# Altium PCB Glucometer-I.C.- RF Module.PcbDoc
Units mm, origin at the board's own origin, x right, y up, seen from the top; angles counter-clockwise.
Board outline 26.85 x 32.2 mm, 2 copper layers (Top Layer, Bottom Layer); 2 components, 9 nets, 22 pads, 0 vias.
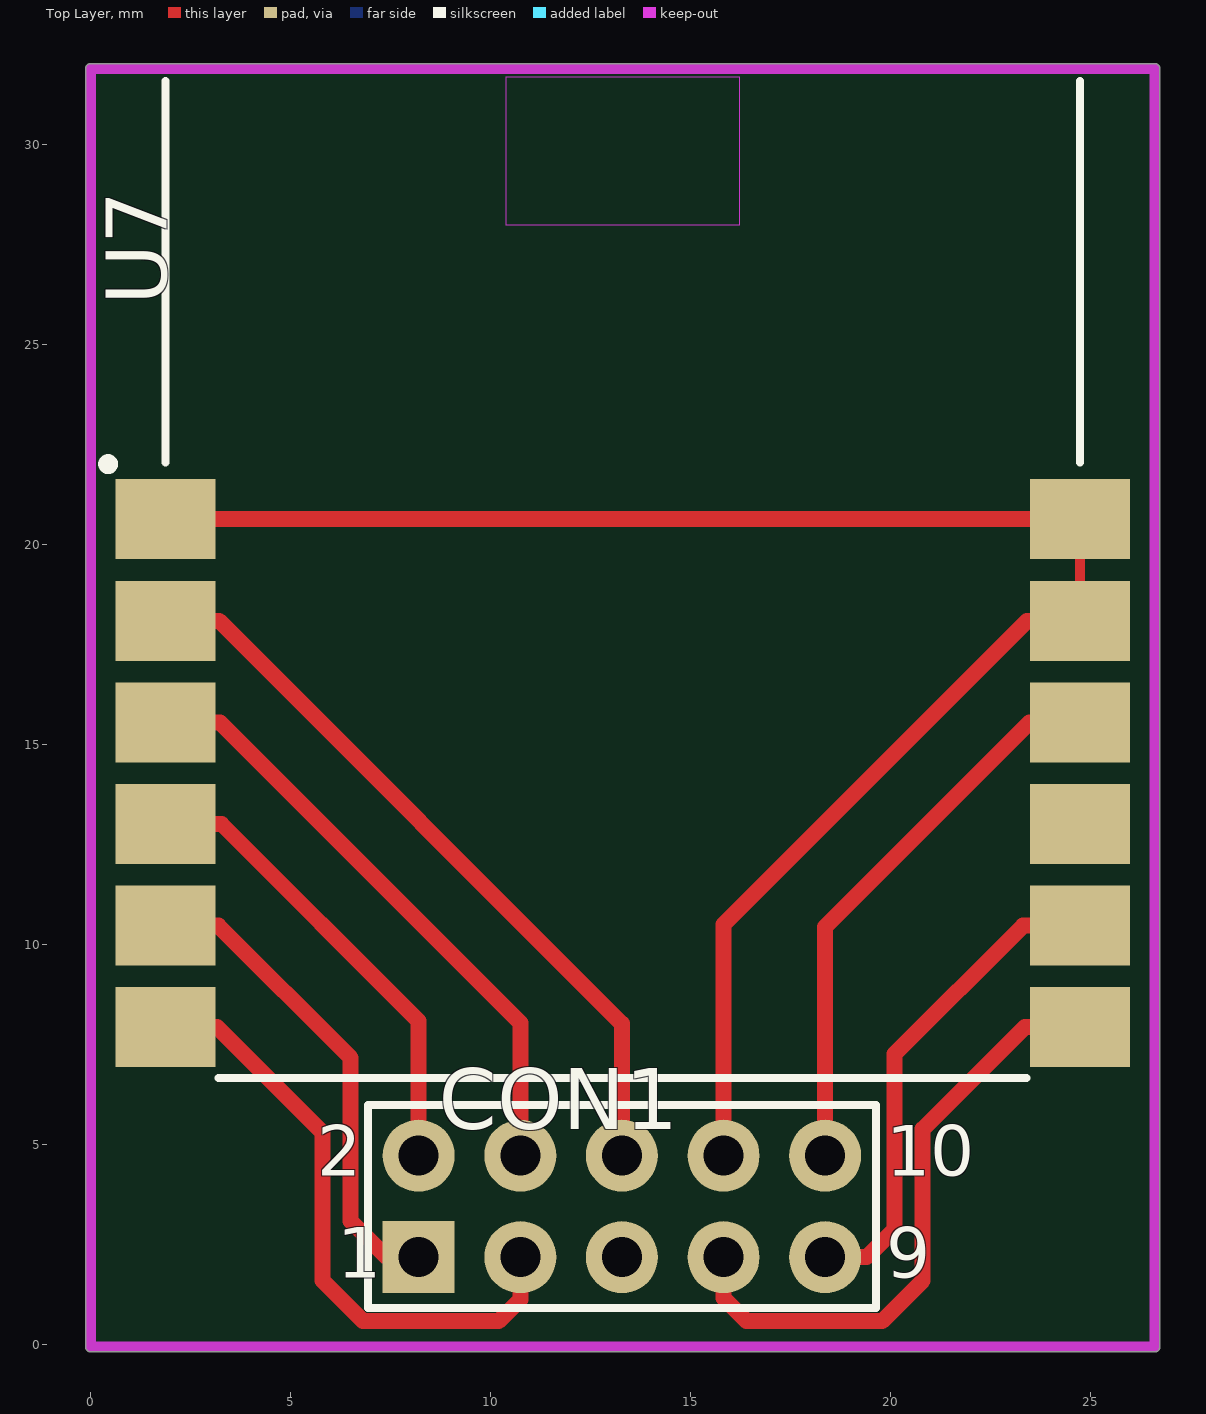
[diagram p0: Top Layer view]
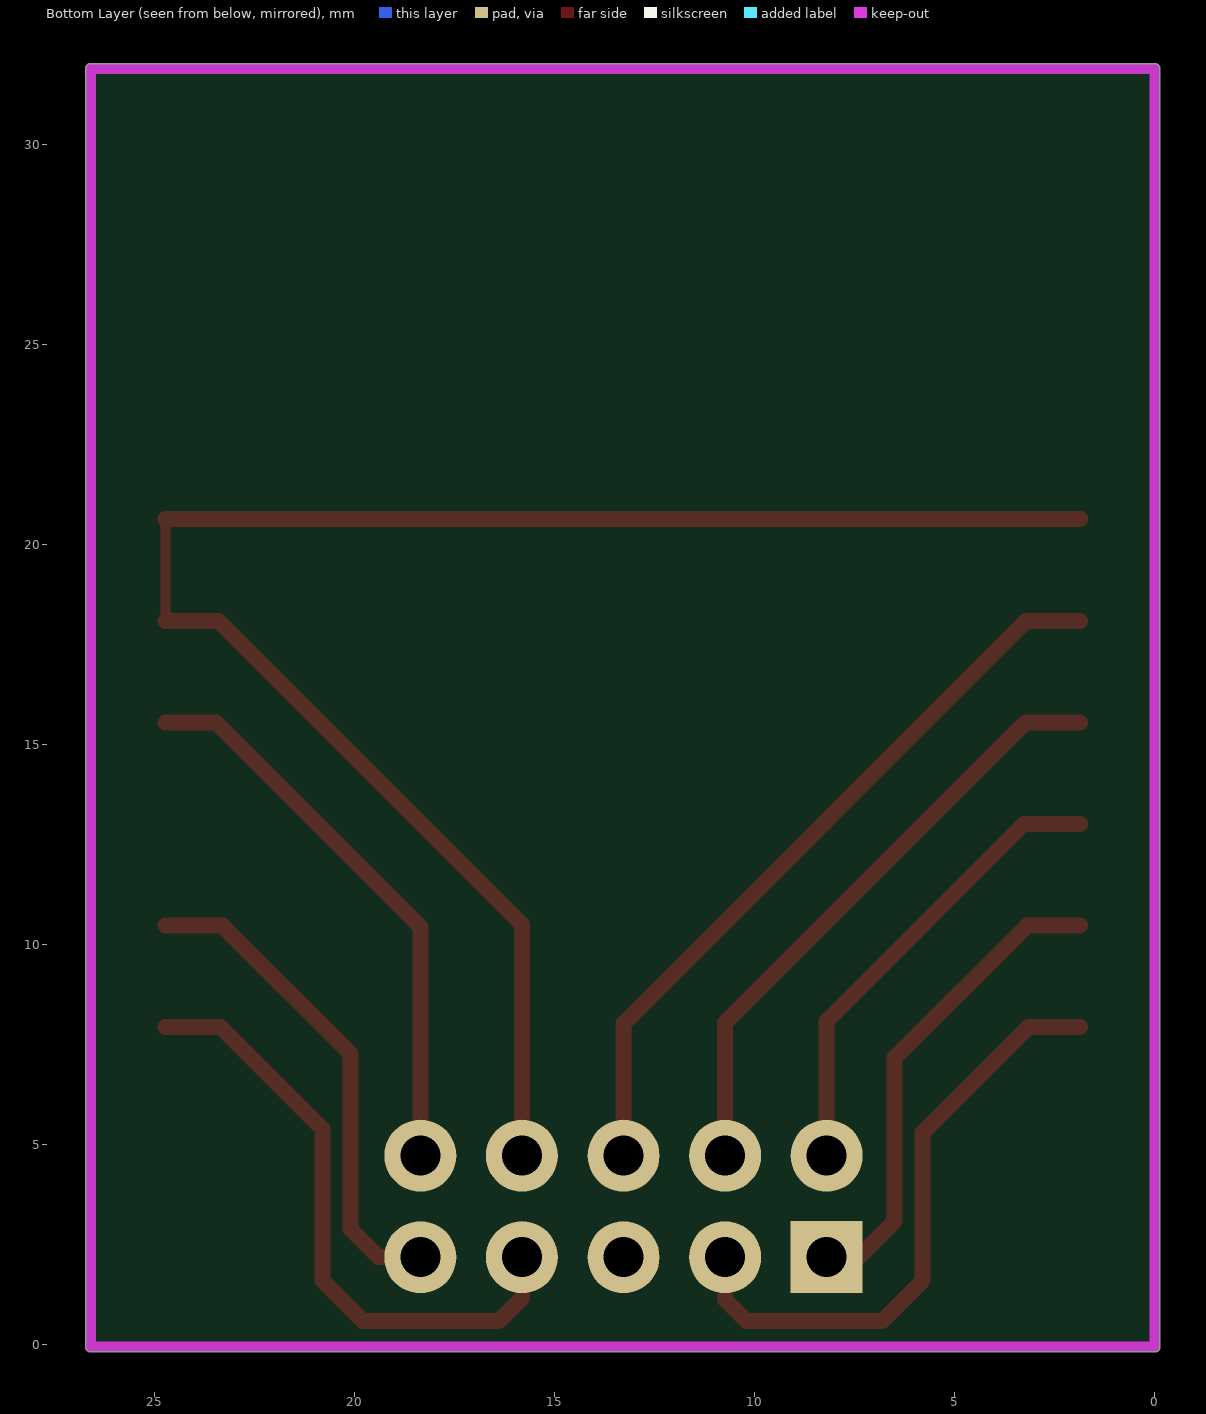
[diagram p1: Bottom Layer view, seen from below]

## Layer stack, top to bottom
Top Layer: signal copper 0.0356
Dielectric: dielectric 0.32, FR-4, Dk 4.8
Bottom Layer: signal copper 0.0356

## Board outline
-0.127,-0.05 ccw(c0,-0.05) 0,-0.177 26.6,-0.177 ccw(c26.6,-0.05) 26.727,-0.05 26.727,31.9 ccw(c26.6,31.9) 26.6,32.027 0,32.027 ccw(c0,31.9) -0.127,31.9

## Design rules (kind name [scope] priority, off if disabled: settings)
Clearance [All] p1: gap=0.3
PolygonConnect [All] p1: connectstyle=Relief reliefconductorwidth=0.254 reliefentries=4 polygonreliefangle="90 Angle" airgapwidth=0.254
RoutingVias [All] p1: holewidth=0.711 width=1.27 viastyle="Through Hole" minholewidth=0.711 minwidth=1.27 maxholewidth=0.711 maxwidth=1.27
SolderMaskExpansion [All] p1: expansion=0.102
Width [All] p1: maxlimit=5 minlimit=0.25 preferedwidth=0.3 minimp=50.000000 maximp=50.000000 favimp=50.000000
28 further rules are at their usual default settings.

## Components (designator, comment, footprint, x,y, rotation, side; value= is the part's Value field where it differs from the comment)
CON1 "Header 5X2" HDR2X5 8.2,2.187 r0 top
U7 "MRF24J40MB-I/RM" MRF24J40MB 13.3,31.688 r0 top

## Footprints (in the part's own frame and the unit in brackets; to place one, negate y for a bottom-side part, rotate by r counter-clockwise, add the part's x,y. Pads: shape width x height; smd on the part's side, far side on the other; paste and mask are expansions set on the pad)
HDR2X5 [mm] "Connector; Header; 5x2 Position"
  rect 1.8x1.8 hole 1: 1(0,0)
  round 1.8 hole 1: 2(0,2.54) 3(2.54,0) 4(2.54,2.54) 5(5.08,0) 6(5.08,2.54) 7(7.62,0) 8(7.62,2.54) 9(10.16,0) 10(10.16,2.54)
  silkscreen extent -1.27,-1.27 11.43,3.81
MRF24J40MB [mm] "SM Module; 12 Leads; Body 33x22.9x2.5mm (LxWxH), Microchip Recommended"
  rect 2.5x2 smd paste-4.05 mask+0.051: 1(-11.43,-11.049) 2(-11.43,-13.589) 3(-11.43,-16.129) 4(-11.43,-18.669) 5(-11.43,-21.209) 6(-11.43,-23.749) 7(11.43,-23.749) 8(11.43,-21.209) 9(11.43,-18.669) 10(11.43,-16.129) 11(11.43,-13.589) 12(11.43,-11.049)
  Top Layer keep-out region: -2.921,-3.683 2.921,-3.683 2.921,0 -2.921,0
  silkscreen extent -12.99,-25.02 11.43,-0.1, body extent -11.43,-25.02 11.43,8, height 2.54

## Part data
CON1: "Header, 5-Pin, Dual row"
U7: "2.4 GHz IEEE Std. 802.15.4, 20 dBm RF Transceiver 12-Pin Module, Industrial Temperature"

## Nets (pads, with @x,y where several pads share a name; then routed paths per layer and width w, separated by ;. In a path a pad name is that pad's centre, name@x,y a point inside that pad or via, vN(x,y) a via of type N, cw(c..) or ccw(c..) an arc to the next point about the centre after c; other vN are vias at no path point)
3.3V: CON1.10 U7.10 | length 14.2
  Top Layer w0.4: CON1.10 18.36,10.448 23.471,15.559 U7.10
GND: CON1.8 U7.1 U7.11 U7.12 | length 43.2
  Top Layer w0.254: U7.11 U7.12
  Top Layer w0.4: U7.1 U7.12 ; CON1.8 15.82,10.507 23.411,18.099 U7.11
NetCON1_1: CON1.1 U7.5 | length 12.2
  Top Layer w0.3: CON1.1@7.4,2.187 CON1.1
  Top Layer w0.4: U7.5 3.191,10.479 6.5,7.17 6.5,3.087 CON1.1@7.4,2.187
NetCON1_2: CON1.2 U7.4 | length 11.7
  Top Layer w0.4: U7.4 3.269,13.019 8.2,8.087 CON1.2
NetCON1_3: CON1.3 U7.6 | length 15.4
  Top Layer w0.4: U7.6 3.161,7.939 5.8,5.3 5.8,1.6 6.813,0.587 10.2,0.587 10.74,1.127 CON1.3
NetCON1_4: CON1.4 U7.3 | length 15.3
  Top Layer w0.4: U7.3 3.229,15.559 10.74,8.047 CON1.4
NetCON1_6: CON1.6 U7.2 | length 18.9
  Top Layer w0.4: U7.2 3.211,18.099 13.28,8.03 CON1.6
NetCON1_7: CON1.7 U7.7 | length 15.4
  Top Layer w0.4: CON1.7 15.82,1.168 16.4,0.587 19.787,0.587 20.8,1.6 20.8,5.387 23.351,7.939 U7.7
NetCON1_9: CON1.9 U7.8 | length 12.4
  Top Layer w0.4: CON1.9 19.4,2.187 20.1,2.887 20.1,7.27 23.309,10.479 U7.8
pads on no net: CON1.5 U7.9

## Keep-outs
Keep-Out Layer:
  lines w0.254: 0,-0.05 0,31.9 26.6,31.9 26.6,-0.05 0,-0.05

## Dimensions
26.6,31.9 to 26.6,-0.05 on Keep-Out Layer
0,-0.05 to 26.6,-0.05 on Keep-Out Layer
24.8,39.688 to 26.6,-0.05 on Top Overlay

## Text inside footprints (layer, text, board x,y; h text height)
CON1: Top Overlay "2" at 5.66,4.219 h1.27; Top Overlay "1" at 6.168,1.679 h1.27; Top Overlay "9" at 19.884,1.679 h1.27; Top Overlay "10" at 19.884,4.219 h1.27